# EAGLE board OLED (EAGLE 7.1.0)
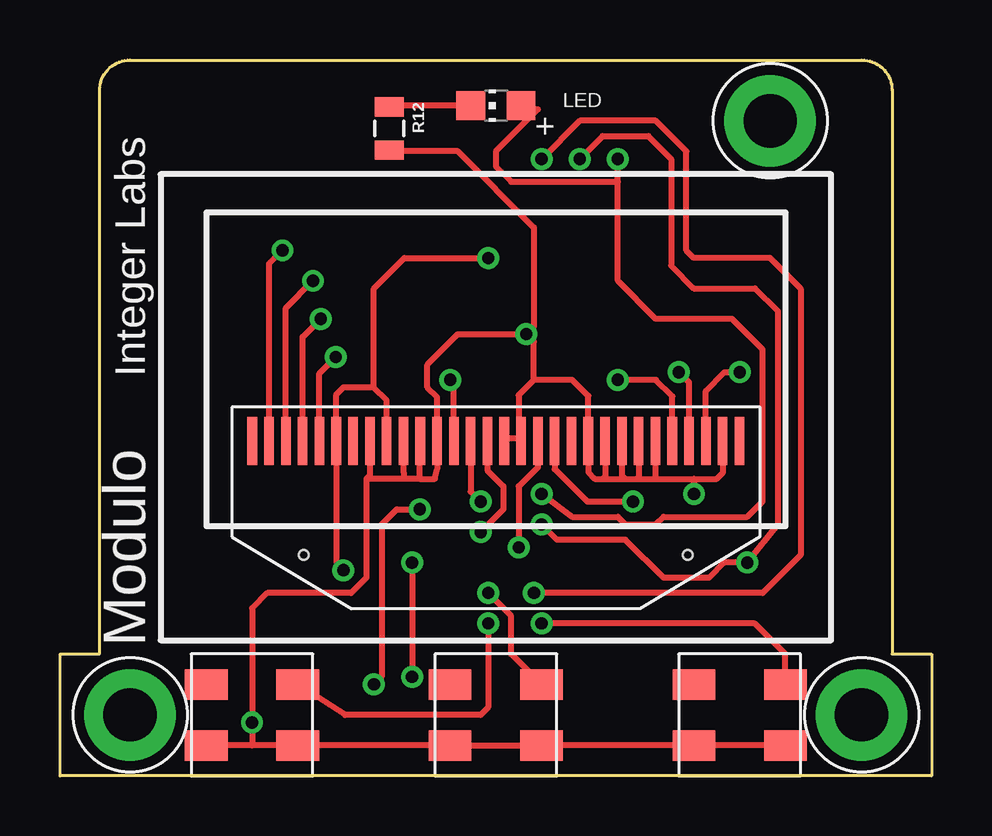
[diagram p0: board, top side]
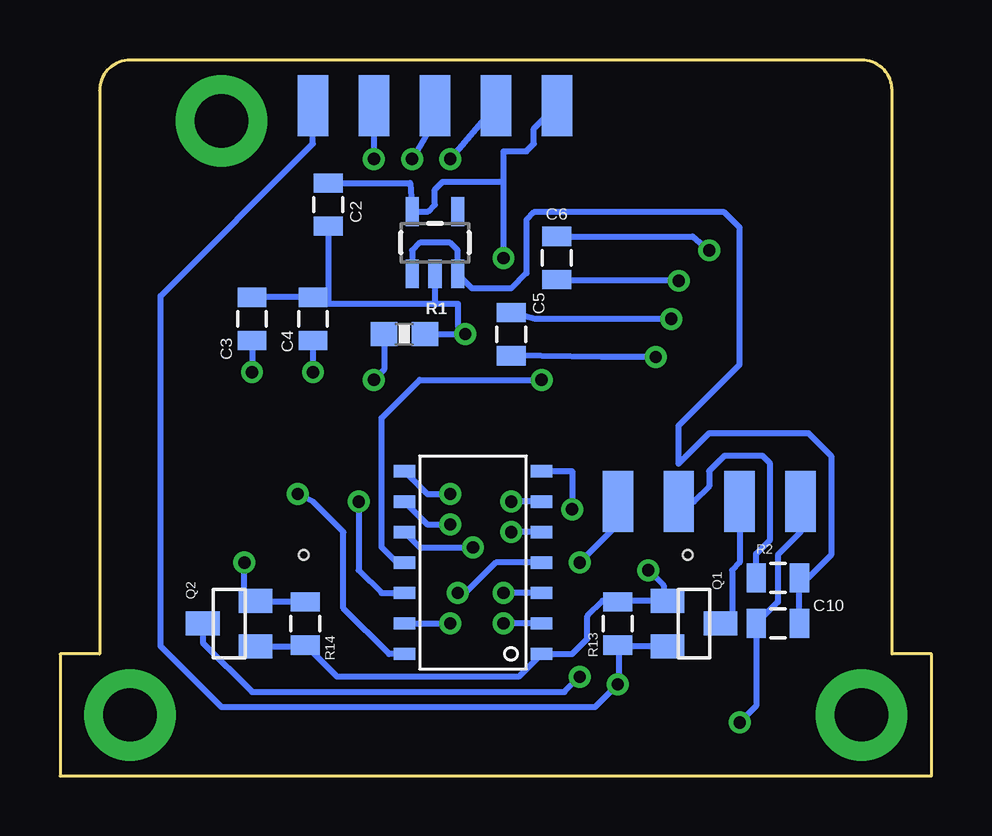
[diagram p1: board, bottom side, seen from below]

Size 36.32 x 29.84 mm. Coordinates in mm from the lower left corner, seen from the top.
Copper layers (1*16): Top 0.0178mm / dielectric 59mil / Bottom 0.0178mm
Design rules "SSC-EAGLE-2Lyr_v1.0.0.3": minimum track width 6mil, minimum drill 14mil, track to track 6mil, track to pad 6mil, pad to pad 6mil, via to via 6mil, smd to smd 6mil, copper to edge 20mil, drill to drill 16mil, minimum pad ring 8mil, minimum via ring 8mil, stop-mask expansion 3mil, vias tented up to drill 0mil, thermal gap 10mil

## Footprints (pad centres in the part's own frame; a part is rotated, then mirrored left to right if it is on the bottom)
0805 = smd 0.8 x 1.2: 1 -0.9,0; 2 0.9,0
CHIP-LED0805 = smd 1.2 x 1.2: A 0,-1.05; C 0,1.05
SOT23 = smd 1 x 1.4: 1 -0.95,-1.1; 2 0.95,-1.1; 3 0,1.1
0603-RES = smd 1.1 x 1: 1 -0.85,0; 2 0.85,0
FPC-30-REVERSE = smd 0.4 x 2: 1 10.15,-2.54; 2 9.45,-2.54; 3 8.75,-2.54; 4 8.05,-2.54; 5 7.35,-2.54; 6 6.65,-2.54; 7 5.95,-2.54; 8 5.25,-2.54; 9 4.55,-2.54; 10 3.85,-2.54; 11 3.15,-2.54; 12 2.45,-2.54; 13 1.75,-2.54; 14 1.05,-2.54; 15 0.35,-2.54; 16 -0.35,-2.54; 17 -1.05,-2.54; 18 -1.75,-2.54; 19 -2.45,-2.54; 20 -3.15,-2.54; 21 -3.85,-2.54; 22 -4.55,-2.54; 23 -5.25,-2.54; 24 -5.95,-2.54; 25 -6.65,-2.54; 26 -7.35,-2.54; 27 -8.05,-2.54; 28 -8.75,-2.54; 29 -9.45,-2.54; 30 -10.15,-2.54 | hole 0.4: -8,2.21; 8,2.21
SOT23-5 = smd 0.55 x 1.2: 1 -0.95,-1.3; 2 0,-1.3; 3 0.95,-1.3; 4 0.95,1.3; 5 -0.95,1.3
SOIC14 = smd 0.508 x 0.889: 1 0,-3.175; 2 1.27,-3.175; 3 2.54,-3.175; 4 3.81,-3.175; 5 5.08,-3.175; 6 6.35,-3.175; 7 7.62,-3.175; 8 7.62,2.54; 9 6.35,2.54; 10 5.08,2.54; 11 3.81,2.54; 12 2.54,2.54; 13 1.27,2.54; 14 0,2.54
FOOTPRINT2 = smd 1.27 x 2.54 bottom: BUS0 5.08,11.43; BUS1 7.62,11.43; BUS2 10.16,11.43; BUS3 12.7,11.43; PROG0 15.24,27.94; PROG1 17.78,27.94; PROG2 20.32,27.94; PROG3 22.86,27.94; PROG4 25.4,27.94 | drill 2.223 pad 3.81: P$1 2.54,2.54; P$2 33.02,2.54; P$3 29.21,27.305
BOURNS-7914J = smd 1.27 x 1.778: NEG$1 1.27,1.905; NEG$2 1.27,-1.905; POS$1 -1.27,1.905; POS$2 -1.27,-1.905

## Placement (x,y rotation side)
C2  .47uF  [0805]  25.15,23.81 90 bottom
C3  2.2uF  [0805]  28.32,19.05 90 bottom
C4  2.2uF  [0805]  25.78,19.05 90 bottom
C5  1uF  [0805]  17.53,18.41 90 bottom
C6  1uF  [0805]  15.62,21.59 90 bottom
C10  .47uF  [0805]  6.41,6.35 0 bottom
LED  blue  [CHIP-LED0805]  18.16,27.94 90 top
Q1  MOSFET-NCHANNELBSS138  [SOT23]  9.91,6.35 270 bottom
Q2  MOSFET-NCHANNELBSS138  [SOT23]  29.27,6.35 90 bottom
R1  390k  [0603-RES]  21.97,18.41 180 bottom
R2  1  [0805]  6.41,8.26 180 bottom
R12  680  [0805]  13.72,26.99 90 top
R13  2k  [0805]  13.08,6.35 90 bottom
R14  2k  [0805]  26.1,6.35 270 bottom
U$1  OLEDREVERSE  [FPC-30-REVERSE]  18.16,11.43 180 top
U$2  3.3V/150mA  [SOT23-5]  20.7,22.23 0 bottom
U$3  TINY841  [SOIC14]  19.43,5.08 90 bottom
U$4  FOOTPRINTFOOTPRINT-2  [FOOTPRINT2]  0.38,0 0 top
U$5  TACT-SWITCHBOURNS-7914J  [BOURNS-7914J]  8,2.54 270 top
U$6  TACT-SWITCHBOURNS-7914J  [BOURNS-7914J]  18.16,2.54 270 top
U$7  TACT-SWITCHBOURNS-7914J  [BOURNS-7914J]  28.32,2.54 270 top

## Library data of the parts
C2-C6 C10 = SparkFun-Capacitors
LED = adafruit
Q1 Q2 = SparkFun-DiscreteSemi; PROD_ID: TRANS-00830
R1 = SparkFun-Resistors
R2 R12-R14 = SparkFun-Passives
U$1 U$3 U$5-U$7 = IntegerLabs
U$2 = SparkFun-PowerIC; PROD_ID: VREG-00822
U$4 = IntegerLabs; BOARD: MiniDisplay; VERSION: v4

## Nets
+3.3V: C2.2 Q1.1 Q2.1 R13.2 R14.2 U$1.6 U$1.9 U$2.5 U$3.1 U$4.PROG0
+5V: C10.2 R2.1 U$2.1 U$2.3
BUTTON1: U$3.2 U$5.POS$1
BUTTON2: U$3.3 U$6.POS$1
BUTTON3: U$3.13 U$7.POS$1
DISPLAY_CS: U$1.13 U$3.11
DISPLAY_D/C: U$1.15 U$3.5
DISPLAY_MOSI: U$1.19 U$3.12
DISPLAY_RESET: U$1.14 U$3.6
DISPLAY_SCK: U$1.18 U$3.10
GND: C2.1 C3.2 C4.2 C10.1 R1.1 R12.1 U$1.8 U$1.10 U$1.11 U$1.12 U$1.16 U$1.17 U$1.21 U$1.22 U$1.23 U$1.24 U$1.25 U$1.29 U$2.2 U$3.14 U$4.BUS0 U$5.NEG$1 U$5.NEG$2 U$6.NEG$1 U$6.NEG$2 U$7.NEG$1 U$7.NEG$2
MISO/LED: LED.A U$3.8 U$4.PROG3
N$2: R1.2 U$1.26
N$3: R2.2 U$4.BUS2
N$4: C3.1 U$1.28
N$6: C4.1 U$1.27
N$7: LED.C R12.2
N$9: C5.2 U$1.4
N$10: C6.2 U$1.2
N$11: C5.1 U$1.5
N$12: C6.1 U$1.3
RESET: U$3.4 U$4.PROG1
SCL3.3/SCK: Q2.2 R14.1 U$3.9 U$4.PROG2
SCL5: Q2.3 U$4.BUS3
SDA3.3/MOSI: Q1.2 R13.1 U$3.7 U$4.PROG4
SDA5: Q1.3 U$4.BUS1

## Tracks (layer width: path | path; a pad name or v marks a point on that pad's centre or on a via)
+3.3V  (via drill 0.51)
  Top 0.254: U$1.9 13.61,15.66 13.08,16.19 | 13.08,16.19 11.81,16.19 11.49,15.88 11.49,13.99 U$1.6 11.51,8.91 v11.81,8.57 | 13.08,16.19 13.08,20.32 14.35,21.59 v17.84,21.59
  Bottom 0.254: 17.84,24.77 17.84,26.04 16.89,26.04 16.57,26.35 16.57,26.99 U$4.PROG0 | 17.84,24.77 v17.84,21.59 | C2.2 21.73,24.71 U$2.5 20.99,23.52 20.7,23.81 20.7,24.45 20.38,24.77 17.84,24.77 | Q2.1 26.1,5.4 R14.2 24.78,4.13 17.21,4.13 U$3.1 14.99,5.08 14.35,5.71 14.35,6.67 13.72,7.3 13.13,7.3 R13.2 13.03,7.3 Q1.1 11.18,7.47 11.18,7.94 v11.81,8.57
+5V
  Bottom 0.254: C10.2 R2.1 5.14,8.26 4.19,9.21 4.19,13.34 5.14,14.29 9.27,14.29 10.54,13.02 10.54,14.61 8,17.14 8,22.86 8.64,23.5 16.57,23.5 16.89,23.18 16.89,20.95 17.53,20.32 19.15,20.32 U$2.3 19.75,21.91 20.07,22.23 21.34,22.23 21.65,21.91 U$2.1
BUTTON1  (via drill 0.51)
  Top 0.254: v17.84,6.35 17.84,2.86 17.53,2.54 11.88,2.54 U$5.POS$1
  Bottom 0.254: U$3.2 v17.84,6.35
BUTTON2  (via drill 0.51)
  Top 0.254: U$6.POS$1 18.8,5.08 18.8,6.67 v17.84,7.62
  Bottom 0.254: U$3.3 v17.84,7.62
BUTTON3  (via drill 0.51)
  Top 0.254: v20.07,6.35 28.96,6.35 30.23,5.08 U$7.POS$1
  Bottom 0.254: U$3.13 v20.07,6.35
DISPLAY_CS  (via drill 0.51)
  Top 0.254: U$1.13 16.41,16.35 v16.26,16.51
  Bottom 0.254: U$3.11 22.29,8.89 22.92,9.53 22.92,14.92 21.34,16.51 v16.26,16.51
DISPLAY_D/C  (via drill 0.51)
  Top 0.254: U$1.15 17.81,12.73 18.48,12.06 18.48,11.11 v17.53,10.16
  Bottom 0.254: U$3.5 v17.53,10.16
DISPLAY_MOSI  (via drill 0.51)
  Top 0.254: U$1.19 20.61,12.79 21.97,11.43 v23.88,11.43
  Bottom 0.254: v23.88,11.43 23.88,8.57 22.92,7.62 U$3.12
DISPLAY_RESET  (via drill 0.51)
  Top 0.254: U$1.14 17.11,11.85 v17.53,11.43
  Bottom 0.254: U$3.6 v17.53,11.43
DISPLAY_SCK  (via drill 0.51)
  Top 0.254: U$1.18 19.91,12.86 19.11,12.06 v19.11,9.53
  Bottom 0.254: U$3.10 21.34,9.53 v19.11,9.53
GND  (via drill 0.51)
  Top 0.254: U$1.8 12.91,12.53 | 14.99,12.38 14.99,13.95 U$1.11 | U$1.29 27.61,12.62 27.37,12.38 26.42,12.38 | 24.83,12.38 24.83,13.95 U$1.25 | 19.75,16.51 21.34,16.51 22.01,15.84 U$1.21 22.01,12.66 22.29,12.38 22.61,12.38 | 19.75,16.51 19.11,15.88 19.11,14.07 | 19.11,14.07 U$1.17 | 19.75,16.51 19.75,18.1 v19.43,18.41 | v19.43,18.41 19.75,18.73 19.75,22.86 16.57,26.04 14.03,26.04 13.98,26.09 R12.1 | 14.99,12.38 14.35,12.38 | 14.35,12.38 12.91,12.38 12.91,12.53 | 19.11,14.07 18.61,14.07 U$1.16 | v19.43,18.41 16.57,18.41 15.3,17.14 15.3,16.19 15.71,15.79 U$1.12 15.71,12.79 15.62,12.38 14.99,12.38 | U$1.10 14.31,12.74 14.35,12.38 | 22.61,12.38 23.56,12.38 | 23.56,12.38 24.19,12.38 | 24.19,12.38 24.83,12.38 | U$1.22 22.71,12.49 22.61,12.38 | U$1.23 23.41,12.53 23.56,12.38 | U$1.24 24.11,12.46 24.19,12.38 | 24.83,12.38 26.42,12.38 | 12.91,12.53 12.76,12.38 12.76,8.26 12.13,7.62 8.64,7.62 8,6.99 v8,2.22 8,1.27 | 26.42,12.38 v26.42,11.75 | 8,1.27 U$5.NEG$1 U$6.NEG$2 U$6.NEG$1 U$7.NEG$2 U$7.NEG$1 | 8,1.27 U$5.NEG$2
  Bottom 0.254: R1.1 v19.43,18.41 19.75,18.73 19.75,19.68 20.7,19.68 | U$2.2 20.7,19.68 | 25.15,19.68 20.7,19.68 | C2.1 25.15,19.68 | 25.15,19.68 25.78,19.68 C4.2 C3.2 | U$3.14 22.61,5.08 24.51,6.99 24.51,10.16 25.78,11.43 v26.42,11.75 | v8,2.22 7.31,2.91 C10.1 6.41,7.25 6.41,9.21 5.46,10.16 U$4.BUS0
MISO/LED  (via drill 0.51)
  Top 0.254: v20.07,11.75 21.34,10.79 23.24,10.79 23.56,10.48 24.83,10.48 25.15,10.79 28.64,10.79 29.27,11.43 29.27,17.78 28,19.05 24.83,19.05 23.24,20.64 23.24,24.77 | 23.24,24.77 v23.24,25.72 | LED.A 19.91,27.79 18.16,26.04 18.16,25.4 18.8,24.77 23.24,24.77
  Bottom 0.254: U$3.8 21.02,11.75 v20.07,11.75 | U$4.PROG3 v23.24,25.72
N$2  (via drill 0.51)
  Top 0.254: U$1.26 25.51,15.83 24.83,16.51 v23.24,16.51
  Bottom 0.254: R1.2 22.82,16.93 v23.24,16.51
N$3
  Bottom 0.254: R2.2 7.31,9.26 6.73,9.84 6.73,13.02 7.05,13.34 8.64,13.34 9.27,12.7 9.27,12.06 9.91,11.43 U$4.BUS2
N$4  (via drill 0.51)
  Top 0.254: U$1.28 26.91,16.05 27.69,16.83 v28.32,16.83
  Bottom 0.254: C3.1 v28.32,16.83
N$6  (via drill 0.51)
  Top 0.254: U$1.27 26.21,16.4 v25.78,16.83
  Bottom 0.254: C4.1 v25.78,16.83
N$7
  Top 0.254: LED.C 13.72,27.94 13.77,27.89 R12.2
N$9  (via drill 0.51)
  Top 0.254: U$1.4 10.11,18.3 v10.86,19.05
  Bottom 0.254: v10.86,19.05 16.52,19.05 C5.2
N$10  (via drill 0.51)
  Top 0.254: U$1.2 8.71,21.35 v9.27,21.91
  Bottom 0.254: C6.2 9.96,22.49 v9.27,21.91
N$11  (via drill 0.51)
  Top 0.254: U$1.5 10.81,16.78 v11.49,17.46
  Bottom 0.254: v11.49,17.46 13.77,17.46 C5.1
N$12  (via drill 0.51)
  Top 0.254: U$1.3 9.41,19.51 v10.54,20.64
  Bottom 0.254: v10.54,20.64 15.57,20.64 C6.1
RESET  (via drill 0.51)
  Top 0.254: v19.75,7.62 29.27,7.62 30.86,9.21 30.86,20.32 29.59,21.59 26.42,21.59 26.1,21.91 26.1,26.04 24.83,27.3 21.65,27.3 v20.07,25.72
  Bottom 0.254: U$3.4 18.16,8.89 19.43,7.62 v19.75,7.62 | U$4.PROG1 v20.07,25.72
SCL3.3/SCK  (via drill 0.51)
  Top 0.254: v20.07,10.48 20.7,9.84 23.56,9.84 25.15,8.26 27.05,8.26 27.69,8.89 v28.64,8.89 29.91,10.48 29.91,19.37 28.96,20.32 26.42,20.32 25.46,21.27 25.46,25.72 24.51,26.67 22.61,26.67 v21.65,25.72
  Bottom 0.254: U$3.9 21.65,11.11 21.02,10.48 v20.07,10.48 | U$4.PROG2 20.7,27.3 v21.65,25.72 | Q2.2 28.64,7.3 28.64,7.62 | 28.64,7.62 v28.64,8.89 | R14.1 28.32,7.25 28.32,7.62 28.64,7.62
SCL5  (via drill 0.51)
  Top 0.254: v14.67,8.89 v14.67,4.13
  Bottom 0.254: U$4.BUS3 13.08,10.48 v14.67,8.89 | Q2.3 30.37,5.54 28.32,3.49 15.3,3.49 v14.67,4.13
SDA3.3/MOSI  (via drill 0.51)
  Top 0.254: v14.99,11.11 14.03,11.11 13.4,10.48 13.4,4.13 v13.08,3.81
  Bottom 0.254: U$4.PROG4 25.78,26.35 32.13,20 32.13,5.4 29.59,2.86 14.03,2.86 v13.08,3.81 13.03,3.86 13.03,5.4 | U$3.7 14.99,12.7 v14.99,11.11 | Q1.2 13.03,5.4 | 13.03,5.4 R13.1
SDA5
  Bottom 0.254: U$4.BUS1 8,8.89 8.32,8.57 8.32,6.82 Q1.3